# EAGLE board Bus Controller (EAGLE 5.01)

Size 96.52 x 63.5 mm. Coordinates in mm from the lower left corner, seen from the top.
Outline: 0,0 96.52,0 96.52,63.5 0,63.5 0,0
Copper layers (1*16): Top 0.035mm / dielectric 1.5mm / Bottom 0.035mm
Design rules "default": minimum track width 10mil, minimum drill 24mil, track to track 8mil, track to pad 8mil, pad to pad 8mil, via to via 8mil, smd to smd 8mil, copper to edge 40mil, drill to drill 8mil, minimum pad ring 10mil, minimum via ring 8mil, stop-mask expansion 4mil, vias tented up to drill 0mil, thermal gap 10mil
Holes 3.2 mm at 3.81,59.69 92.71,59.69 3.81,3.81 93.98,11.43

## Footprints (pad centres in the part's own frame; a part is rotated, then mirrored left to right if it is on the bottom)
DIL20 = drill 0.813 long: 1 -11.43,-3.81; 2 -8.89,-3.81; 3 -6.35,-3.81; 4 -3.81,-3.81; 5 -1.27,-3.81; 6 1.27,-3.81; 7 3.81,-3.81; 8 6.35,-3.81; 9 8.89,-3.81; 10 11.43,-3.81; 11 11.43,3.81; 12 8.89,3.81; 13 6.35,3.81; 14 3.81,3.81; 15 1.27,3.81; 16 -1.27,3.81; 17 -3.81,3.81; 18 -6.35,3.81; 19 -8.89,3.81; 20 -11.43,3.81
SO20W = smd 0.66 x 2.032: 1 -5.715,-5.029; 2 -4.445,-5.029; 3 -3.175,-5.029; 4 -1.905,-5.029; 5 -0.635,-5.029; 6 0.635,-5.029; 7 1.905,-5.029; 8 3.175,-5.029; 9 4.445,-5.029; 10 5.715,-5.029; 11 5.715,5.029; 12 4.445,5.029; 13 3.175,5.029; 14 1.905,5.029; 15 0.635,5.029; 16 -0.635,5.029; 17 -1.905,5.029; 18 -3.175,5.029; 19 -4.445,5.029; 20 -5.715,5.029
DIL18 = drill 0.813 long: 1 -10.16,-3.81; 2 -7.62,-3.81; 3 -5.08,-3.81; 4 -2.54,-3.81; 5 0,-3.81; 6 2.54,-3.81; 7 5.08,-3.81; 8 7.62,-3.81; 9 10.16,-3.81; 10 10.16,3.81; 11 7.62,3.81; 12 5.08,3.81; 13 2.54,3.81; 14 0,3.81; 15 -2.54,3.81; 16 -5.08,3.81; 17 -7.62,3.81; 18 -10.16,3.81
SO16 = smd 0.66 x 2.032: 1 -4.445,-3.073; 2 -3.175,-3.073; 3 -1.905,-3.073; 4 -0.635,-3.073; 5 0.635,-3.073; 6 1.905,-3.073; 7 3.175,-3.073; 8 4.445,-3.073; 9 4.445,3.073; 10 3.175,3.073; 11 1.905,3.073; 12 0.635,3.073; 13 -0.635,3.073; 14 -1.905,3.073; 15 -3.175,3.073; 16 -4.445,3.073
TO92-CBE = drill 0.813 long: B 0,0; C 2.54,0; E -2.54,0
0207/2V = drill 0.813 octagon: 1 -1.27,0; 2 1.27,0
AK550/2 = drill 1.27 long: 1 -1.75,0; 2 1.75,0

## Placement (x,y rotation side)
IC1  74LS374N  [DIL20]  41.91,33.02 270 top
IC2  74LS374DW  [SO20W]  59.69,33.02 270 top
IC3  PIC16F628P  [DIL18]  8.89,27.94 270 top
IC4  74LS138D  [SO16]  8.89,46.99 270 top
IC5  74LS244DW  [SO20W]  77.47,33.02 270 top
Q1  2N4401  [TO92-CBE]  22.86,49.53 0 top
Q2  2N4401  [TO92-CBE]  30.48,49.53 0 top
Q3  2N4401  [TO92-CBE]  38.1,49.53 0 top
Q4  2N4401  [TO92-CBE]  45.72,49.53 0 top
Q5  2N4401  [TO92-CBE]  53.34,49.53 0 top
Q6  2N4401  [TO92-CBE]  60.96,49.53 0 top
Q7  2N4401  [TO92-CBE]  68.58,49.53 0 top
Q8  2N4401  [TO92-CBE]  76.2,49.53 0 top
Q9  2N4401  [TO92-CBE]  22.86,15.24 180 top
Q10  2N4401  [TO92-CBE]  30.48,15.24 180 top
Q11  2N4401  [TO92-CBE]  38.1,15.24 180 top
Q12  2N4401  [TO92-CBE]  45.72,15.24 180 top
Q13  2N4401  [TO92-CBE]  53.34,15.24 180 top
Q14  2N4401  [TO92-CBE]  60.96,15.24 180 top
Q15  2N4401  [TO92-CBE]  68.58,15.24 180 top
Q16  2N4401  [TO92-CBE]  76.2,15.24 180 top
R1  [0207/2V]  21.59,45.72 0 top
R2  [0207/2V]  29.21,45.72 0 top
R3  [0207/2V]  36.83,45.72 0 top
R4  [0207/2V]  44.45,45.72 0 top
R5  [0207/2V]  52.07,45.72 0 top
R6  [0207/2V]  59.69,45.72 0 top
R7  [0207/2V]  67.31,45.72 0 top
R8  [0207/2V]  74.93,45.72 0 top
R9  [0207/2V]  24.77,53.98 270 top
R10  [0207/2V]  32.38,53.98 270 top
R11  [0207/2V]  40.01,53.98 270 top
R12  [0207/2V]  47.62,53.98 270 top
R13  [0207/2V]  55.24,53.98 270 top
R14  [0207/2V]  62.87,53.98 270 top
R15  [0207/2V]  70.48,53.98 270 top
R16  [0207/2V]  78.11,53.98 270 top
R17  [0207/2V]  20.95,53.98 270 top
R18  [0207/2V]  28.57,53.98 270 top
R19  [0207/2V]  36.2,53.98 270 top
R20  [0207/2V]  43.81,53.98 270 top
R21  [0207/2V]  51.44,53.98 270 top
R22  [0207/2V]  59.05,53.98 270 top
R23  [0207/2V]  66.67,53.98 270 top
R24  [0207/2V]  74.3,53.98 270 top
R25  [0207/2V]  24.13,19.05 180 top
R26  [0207/2V]  31.75,19.05 180 top
R27  [0207/2V]  39.37,19.05 180 top
R28  [0207/2V]  46.99,19.05 180 top
R29  [0207/2V]  54.61,19.05 180 top
R30  [0207/2V]  62.23,19.05 180 top
R31  [0207/2V]  69.85,19.05 180 top
R32  [0207/2V]  77.47,19.05 180 top
R33  [0207/2V]  20.95,10.16 90 top
R34  [0207/2V]  28.57,10.16 90 top
R35  [0207/2V]  36.2,10.16 90 top
R36  [0207/2V]  43.81,10.16 90 top
R37  [0207/2V]  52.07,10.16 90 top
R38  [0207/2V]  59.05,10.16 90 top
R39  [0207/2V]  66.67,10.16 90 top
R40  [0207/2V]  74.3,10.16 90 top
R41  [0207/2V]  24.77,10.16 90 top
R42  [0207/2V]  32.38,10.16 90 top
R43  [0207/2V]  40.01,10.16 90 top
R44  [0207/2V]  47.62,10.16 90 top
R45  [0207/2V]  55.24,10.16 90 top
R46  [0207/2V]  62.87,10.16 90 top
R47  [0207/2V]  70.48,10.16 90 top
R48  [0207/2V]  78.11,10.16 90 top
X1  [AK550/2]  22.86,59.69 180 top
X2  [AK550/2]  30.48,59.69 180 top
X3  [AK550/2]  38.1,59.69 180 top
X4  [AK550/2]  45.72,59.69 180 top
X5  [AK550/2]  53.34,59.69 180 top
X6  [AK550/2]  60.96,59.69 180 top
X7  [AK550/2]  68.58,59.69 180 top
X8  [AK550/2]  76.2,59.69 180 top
X9  [AK550/2]  15.24,59.69 180 top
X10  [AK550/2]  83.82,59.69 180 top
X11  [AK550/2]  22.86,3.81 0 top
X12  [AK550/2]  30.48,3.81 0 top
X13  [AK550/2]  38.1,3.81 0 top
X14  [AK550/2]  45.72,3.81 0 top
X15  [AK550/2]  53.34,3.81 0 top
X16  [AK550/2]  60.96,3.81 0 top
X17  [AK550/2]  68.58,3.81 0 top
X18  [AK550/2]  76.2,3.81 0 top
X19  [AK550/2]  15.24,3.81 0 top
X20  [AK550/2]  83.82,3.81 0 top
X21  [AK550/2]  93.98,33.02 270 top
X22  [AK550/2]  93.98,25.4 270 top
X23  [AK550/2]  93.98,17.78 270 top
X24  [AK550/2]  93.98,40.64 270 top

## Library data of the parts
IC1 IC2 IC4 IC5 = 74xx-us
IC3 = microchip
Q1-Q16 = transistor-npn
R1-R48 = resistor
X1-X24 = con-ptr500+

## Nets
D0: IC1.3 IC2.3 IC3.6 IC5.2
D1: IC1.4 IC2.4 IC3.7 IC5.4
D2: IC1.7 IC2.7 IC3.8 IC5.6
D3: IC1.8 IC2.8 IC3.9 IC5.8
D4: IC1.13 IC2.13 IC3.10 IC5.11
D5: IC1.14 IC2.14 IC3.11 IC5.13
D6: IC1.17 IC2.17 IC3.12 IC5.15
D7: IC1.18 IC2.18 IC3.13 IC5.17
GND: IC1.1 IC1.10 IC2.1 IC2.10 IC3.5 IC4.4 IC4.5 IC4.8 IC5.10 X9.2 X10.2 X19.2 X20.2
IN1: IC5.18 X21.1
IN2: IC5.16 X21.2
IN3: IC5.14 X22.1
IN4: IC5.12 X22.2
IN5: IC5.9 X23.1
IN6: IC5.7 X23.2
IN7: IC5.5 X24.1
IN8: IC5.3 X24.2
N$1: IC3.17 IC4.1
N$2: IC3.18 IC4.2
N$3: IC3.1 IC4.3
N$4: IC3.2 IC4.6
N$5: IC2.11 IC4.15
N$6: IC1.11 IC4.14
N$7: Q1.B R1.2
N$8: Q2.B R2.2
N$9: Q3.B R3.2
N$10: Q4.B R4.2
N$11: Q5.B R5.2
N$12: Q6.B R6.2
N$13: Q7.B R7.2
N$14: Q8.B R8.2
N$15: Q1.E R17.2
N$16: Q2.E R18.2
N$17: Q3.E R19.2
N$18: Q4.E R20.2
N$19: Q5.E R21.2
N$20: Q6.E R22.2
N$21: Q7.E R23.2
N$22: Q8.E R24.2
N$23: IC1.2 R1.1
N$24: IC1.5 R2.1
N$25: IC1.6 R3.1
N$26: IC1.9 R4.1
N$27: IC1.12 R5.1
N$28: IC1.15 R6.1
N$29: IC1.16 R7.1
N$30: IC1.19 R8.1
N$31: Q9.B R25.2
N$32: Q10.B R26.2
N$33: Q11.B R27.2
N$34: Q12.B R28.2
N$35: Q13.B R29.2
N$36: Q14.B R30.2
N$37: Q15.B R31.2
N$38: Q16.B R32.2
N$39: Q8.C R16.2
N$40: Q7.C R15.2
N$41: Q6.C R14.2
N$42: Q5.C R13.2
N$43: Q4.C R12.2
N$44: Q3.C R11.2
N$45: Q2.C R10.2
N$46: Q1.C R9.2
N$47: Q9.E R41.2
N$48: Q10.E R42.2
N$49: Q11.E R43.2
N$50: Q12.E R44.2
N$51: Q13.E R45.2
N$52: Q14.E R46.2
N$53: Q15.E R47.2
N$54: Q16.E R48.2
N$55: IC2.2 R25.1
N$56: IC2.5 R26.1
N$57: IC2.6 R27.1
N$58: IC2.9 R28.1
N$59: IC2.12 R29.1
N$60: IC2.15 R30.1
N$61: IC2.16 R31.1
N$62: IC2.19 R32.1
N$63: Q16.C R40.1
N$64: Q15.C R39.1
N$65: Q14.C R38.1
N$66: Q13.C R37.1
N$67: Q12.C R36.1
N$68: Q11.C R35.1
N$69: Q10.C R34.1
N$70: Q9.C R33.1
N$71: IC4.11 IC5.1
N$72: IC4.10 IC5.19
N$73: R17.1 X1.2
N$74: R14.1 X6.1
N$75: R15.1 X7.1
N$76: R16.1 X8.1
N$77: R13.1 X5.1
N$78: R12.1 X4.1
N$79: R11.1 X3.1
N$80: R10.1 X2.1
N$81: R9.1 X1.1
N$82: R18.1 X2.2
N$83: R19.1 X3.2
N$84: R20.1 X4.2
N$85: R22.1 X6.2
N$86: R23.1 X7.2
N$87: R24.1 X8.2
N$88: R21.1 X5.2
N$89: R47.1 X17.2
N$90: R48.1 X18.2
N$91: R46.1 X16.2
N$92: R44.1 X14.2
N$93: R42.1 X12.2
N$94: R43.1 X13.2
N$95: R41.1 X11.2
N$96: R45.1 X15.2
N$97: R34.2 X12.1
N$98: R33.2 X11.1
N$99: R35.2 X13.1
N$100: R36.2 X14.1
N$101: R37.2 X15.1
N$102: R38.2 X16.1
N$103: R39.2 X17.1
N$104: R40.2 X18.1
VCC: IC1.20 IC2.20 IC3.14 IC4.16 IC5.20 X9.1 X10.1 X19.1 X20.1

## Tracks (layer width: path | path; a pad name or v marks a point on that pad's centre or on a via)
D0  (3 unrouted)
D1  (3 unrouted)
D2  (3 unrouted)
D3  (3 unrouted)
D4  (3 unrouted)
D5  (3 unrouted)
D6  (3 unrouted)
D7  (3 unrouted)
GND  (12 unrouted)
IN1  (1 unrouted)
IN2  (1 unrouted)
IN3  (1 unrouted)
IN4  (1 unrouted)
IN5  (1 unrouted)
IN6  (1 unrouted)
IN7  (1 unrouted)
IN8  (1 unrouted)
N$1  (1 unrouted)
N$2  (1 unrouted)
N$3  (1 unrouted)
N$4  (1 unrouted)
N$5  (1 unrouted)
N$6  (1 unrouted)
N$7  (1 unrouted)
N$8  (1 unrouted)
N$9  (1 unrouted)
N$10  (1 unrouted)
N$11  (1 unrouted)
N$12  (1 unrouted)
N$13  (1 unrouted)
N$14  (1 unrouted)
N$15  (1 unrouted)
N$16  (1 unrouted)
N$17  (1 unrouted)
N$18  (1 unrouted)
N$19  (1 unrouted)
N$20  (1 unrouted)
N$21  (1 unrouted)
N$22  (1 unrouted)
N$23  (1 unrouted)
N$24  (1 unrouted)
N$25  (1 unrouted)
N$26  (1 unrouted)
N$27  (1 unrouted)
N$28  (1 unrouted)
N$29  (1 unrouted)
N$30  (1 unrouted)
N$31  (1 unrouted)
N$32  (1 unrouted)
N$33  (1 unrouted)
N$34  (1 unrouted)
N$35  (1 unrouted)
N$36  (1 unrouted)
N$37  (1 unrouted)
N$38  (1 unrouted)
N$39  (1 unrouted)
N$40  (1 unrouted)
N$41  (1 unrouted)
N$42  (1 unrouted)
N$43  (1 unrouted)
N$44  (1 unrouted)
N$45  (1 unrouted)
N$46  (1 unrouted)
N$47  (1 unrouted)
N$48  (1 unrouted)
N$49  (1 unrouted)
N$50  (1 unrouted)
N$51  (1 unrouted)
N$52  (1 unrouted)
N$53  (1 unrouted)
N$54  (1 unrouted)
N$55  (1 unrouted)
N$56  (1 unrouted)
N$57  (1 unrouted)
N$58  (1 unrouted)
N$59  (1 unrouted)
N$60  (1 unrouted)
N$61  (1 unrouted)
N$62  (1 unrouted)
N$63  (1 unrouted)
N$64  (1 unrouted)
N$65  (1 unrouted)
N$66  (1 unrouted)
N$67  (1 unrouted)
N$68  (1 unrouted)
N$69  (1 unrouted)
N$70  (1 unrouted)
N$71  (1 unrouted)
N$72  (1 unrouted)
N$73  (1 unrouted)
N$74  (1 unrouted)
N$75  (1 unrouted)
N$76  (1 unrouted)
N$77  (1 unrouted)
N$78  (1 unrouted)
N$79  (1 unrouted)
N$80  (1 unrouted)
N$81  (1 unrouted)
N$82  (1 unrouted)
N$83  (1 unrouted)
N$84  (1 unrouted)
N$85  (1 unrouted)
N$86  (1 unrouted)
N$87  (1 unrouted)
N$88  (1 unrouted)
N$89  (1 unrouted)
N$90  (1 unrouted)
N$91  (1 unrouted)
N$92  (1 unrouted)
N$93  (1 unrouted)
N$94  (1 unrouted)
N$95  (1 unrouted)
N$96  (1 unrouted)
N$97  (1 unrouted)
N$98  (1 unrouted)
N$99  (1 unrouted)
N$100  (1 unrouted)
N$101  (1 unrouted)
N$102  (1 unrouted)
N$103  (1 unrouted)
N$104  (1 unrouted)
VCC  (8 unrouted)